# Altium PCB Pannelisation_janvier2018.PcbDoc (part 3 of 3)
Units mil, origin at the board's own origin, x right, y up, seen from the top; angles counter-clockwise.
Board outline 6785 x 5025 mil, 2 copper layers (Top Layer, Bottom Layer); 423 components, 0 nets, 1281 pads, 340 vias.
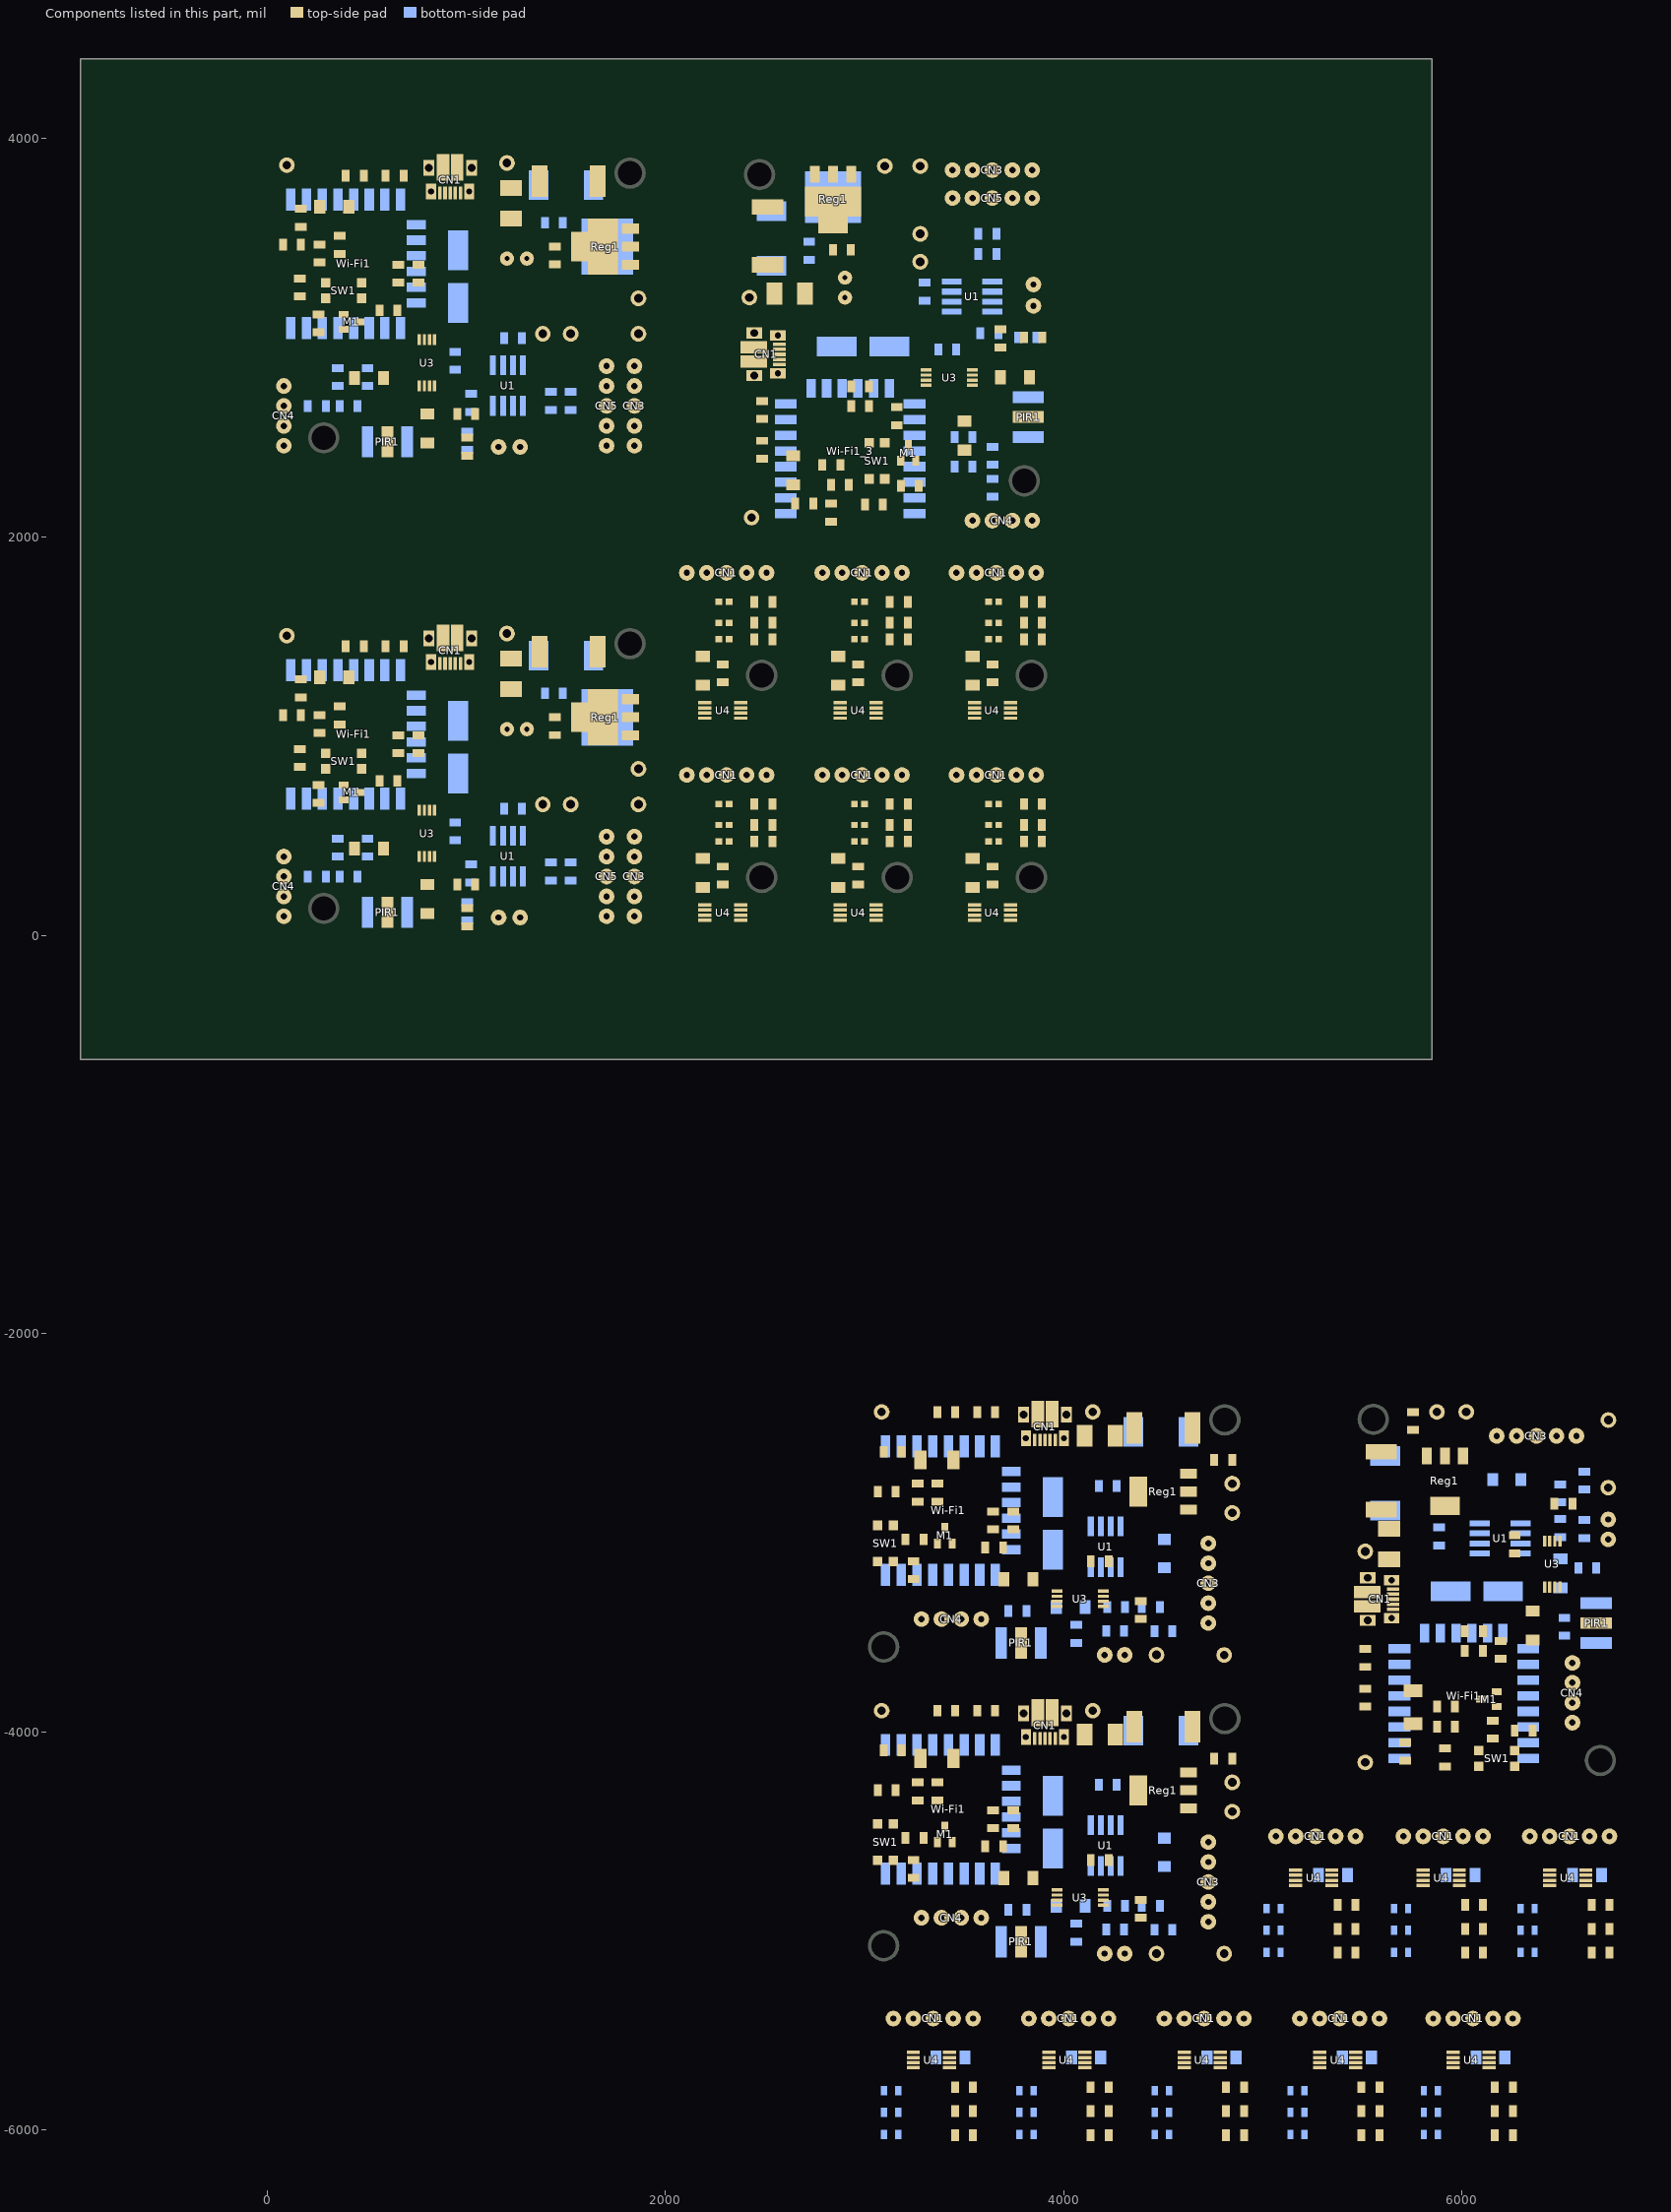
[diagram p3: the components of this part, seen from the top]

## Other copper
Top Layer:
  rectangle: 3847,-2508 3863,-2460
  rectangle: 3847,-2596 3863,-2548
  rectangle: 3740,-2353 4082,-2321
  rectangle: 3740,-3853 4082,-3821
  rectangle: 3847,-4096 3863,-4048
  rectangle: 3847,-4008 3863,-3960
  region: 5628,-3393 5628,-3377 5580,-3377 5580,-3393
  region: 5716,-3393 5716,-3377 5668,-3377 5668,-3393
  region: 5473,-3500 5473,-3158 5441,-3158 5441,-3500
  rectangle: 776,3784 1053,3805
  rectangle: 820,2970 839,3008
  rectangle: 738,3903 1095,3937
  rectangle: 776,1421 1053,1442
  rectangle: 820,607 839,645
  rectangle: 738,1540 1095,1574
  region: 2516,2773 2516,3050 2495,3050 2495,2773
  region: 3330,2817 3330,2836 3292,2836 3292,2817
  region: 2397,2735 2397,3092 2363,3092 2363,2735
  region: 3684,10 3684,166 3602,166 3602,10
  region: 3010,10 3010,166 2928,166 2928,10
  region: 2330,10 2330,166 2248,166 2248,10
  region: 2330,1025 2330,1181 2248,1181 2248,1025
  region: 3010,1025 3010,1181 2928,1181 2928,1025
  region: 3684,1025 3684,1181 3602,1181 3602,1025
Bottom Layer:
  rectangle: 812.72,3729 1023,3854.17
  rectangle: 812.72,1366 1023,1491.17
  region: 2571,2809.72 2571,3020 2445.83,3020 2445.83,2809.72
  region: 3746,10 3746,166 3544,166 3544,10
  region: 3072,10 3072,166 2870,166 2870,10
  region: 2392,10 2392,166 2190,166 2190,10
  region: 2392,1025 2392,1181 2190,1181 2190,1025
  region: 3072,1025 3072,1181 2870,1181 2870,1025
  region: 3746,1025 3746,1181 3544,1181 3544,1025

## Silkscreen, mask and mechanical layers (free items; w line width, h text height)
Mechanical 1:
  lines w10: 0,0 0,3937.01 ; 0,0 3937.01,0 ; 0,0 1940,0 1940,1574 0,1574 0,0 ; 0,3937.01 3937.01,3937.01 ; 0,3937 1940,3937 1940,2363 0,2363 0,3937 ; 3937.01,0 3937.01,3937.01 ; 3937,0 3387,0 3387,875 3937,875 3937,0 ; 3937,3937 2363,3937 2363,1997 3937,1997 3937,3937 ; 2033,0 2033,875 2583,875 2583,0 2033,0 ; 2033,1015 2583,1015 2583,1890 2033,1890 2033,1015 ; 2713,0 2713,875 3263,875 3263,0 2713,0 ; 2713,1015 3263,1015 3263,1890 2713,1890 2713,1015 ; 2945,-6205 2945,-2265 6885,-2265 6885,-6205 2945,-6205 ; 2986,-5184 2986,-3824 4926,-3824 4926,-5184 2986,-5184 ; 2986,-3684 4926,-3684 4926,-2324 2986,-2324 2986,-3684 ; 3045,-6120 3045,-5340 3645,-5340 3645,-6120 3045,-6120 ; 3387,1015 3937,1015 3937,1890 3387,1890 3387,1015 ; 3725,-6120 4325,-6120 4325,-5340 3725,-5340 3725,-6120 ; 4405,-6120 5005,-6120 5005,-5340 4405,-5340 4405,-6120 ; 4965,-5205 4965,-4425 5565,-4425 5565,-5205 4965,-5205 ; 5085,-6120 5085,-5340 5685,-5340 5685,-6120 5085,-6120 ; 5444,-4254 5444,-2314 6804,-2314 6804,-4254 5444,-4254 ; 5605,-5205 6205,-5205 6205,-4425 5605,-4425 5605,-5205 ; 5755,-6120 6355,-6120 6355,-5340 5755,-5340 5755,-6120 ; 6240,-5205 6240,-4425 6840,-4425 6840,-5205 6240,-5205

## Text inside footprints (layer, text, board x,y; h text height)
C3: Bottom Overlay "+" at 1295,3358 h60 r180
C3: Bottom Overlay "+" at 1295,995 h60 r180
C3: Bottom Overlay "+" at 2942,3292 h60 r270
Wi-Fi1: Bottom Overlay "Wi-Fi" at 3123,-2978 h100 r180
Wi-Fi1: Bottom Overlay "Wi-Fi" at 3123,-4478 h100 r180
Wi-Fi1: Bottom Overlay "Wi-Fi" at 6098,-4117 h100 r270
Wi-Fi1: Bottom Overlay "Wi-Fi" at 170,3277 h100 r180
Wi-Fi1: Bottom Overlay "Wi-Fi" at 170,914 h100 r180
Wi-Fi1_3: Bottom Overlay "Wi-Fi" at 3023,2167 h100 r270